# Allegro board RC-TranponderV12.brd
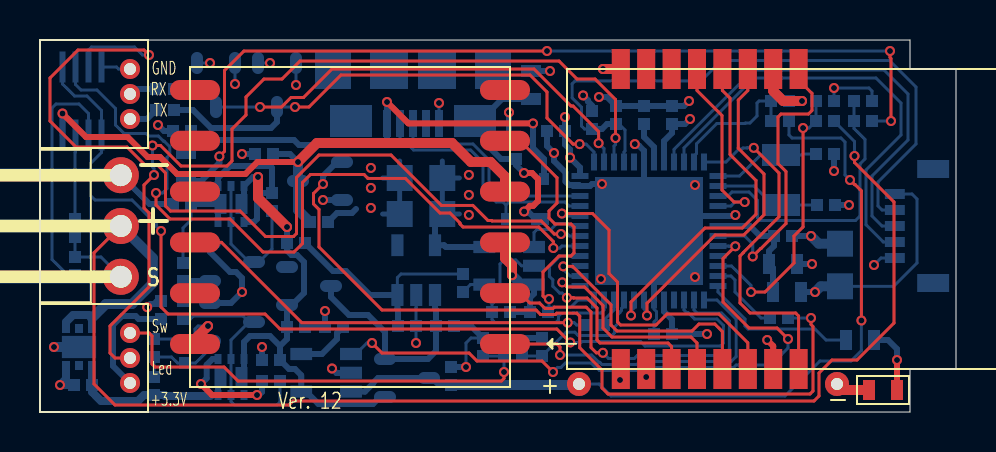
[diagram p0: board, top side]
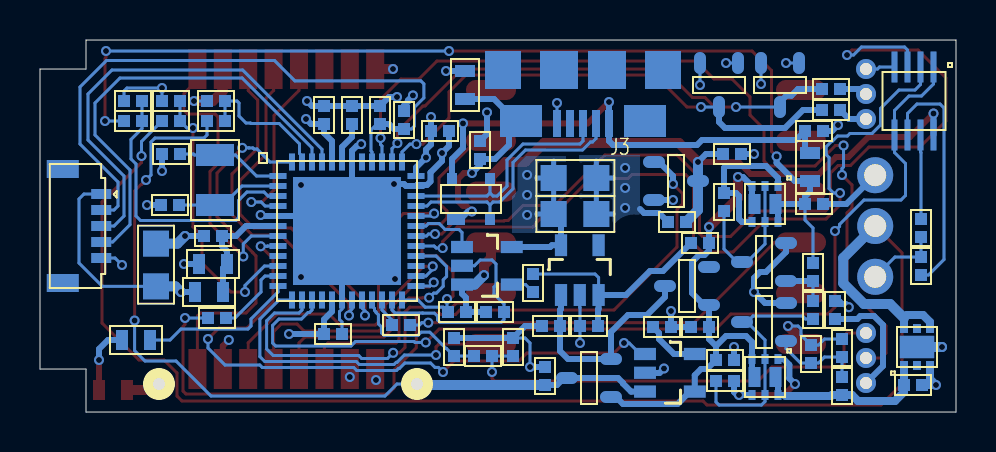
[diagram p1: board, bottom side, seen from below]

Outline 45.8 x 18.6 mm; copper layers: TOP, INNER_LAYER_2, INNER_LAYER_3, BOTTOM. Coordinates in mm from the lower left corner of the outline.
Outline path: 0,18.6 0,0 43.5,0 43.5,2.15 45.8,2.15 45.8,17.15 43.5,17.15 43.5,18.6 0,18.6

## Design rules (mm)
constraint set DEFAULT: min track width 0.15
net group DP1: nets USB_N USB_P

## Placement (name value [footprint] x y rotation side)
C1  1uF/10V  [R_0402]  11.55 2.6 0 bottom
C2  20pF  [R_0402]  39.25 12.9 0 bottom
C3  1uF/10V  [R_0402]  20.55 1.8 270 bottom
C4  100uF/4V  [R_0805]  19.05 11.7 0 bottom
C5  20pF  [R_0402]  39.3 10.35 0 bottom
C6  10uF/6V3  [R_0402]  20.25 4.3 180 bottom
C9  100nF  [R_0402]  31.15 3.9 0 bottom
C10  100nF  [R_0402]  25.8 14.05 0 bottom
C11  100nF  [R_0402]  30.2 14.85 270 bottom
C12  100nF  [R_0402]  37.15 8.8 180 bottom
C13  4.7uF  [R_0603]  37.15 7.4 180 bottom
C14  100nF  [R_0402]  11.2 12.9 0 bottom
C15  1nF  [R_0402]  7.1 10.4 0 bottom
C16  1nF  [R_0402]  7.1 14.05 0 bottom
C17  100nF  [R_0402]  31.6 14.85 270 bottom
C18  100nF  [R_0402]  28.8 14.85 270 bottom
C19  4.7nF / 100V  [R_0603]  24.55 16.35 270 bottom
C20  100nF  [R_0402]  25.1 3.25 270 bottom
C22  100uF/4V  [R_0805]  19.05 9.9 0 bottom
C23  100uF/4V  [R_0805]  40 7.35 270 bottom
C24  10uF/6V3  [R_0402]  13.95 9.5 180 bottom
C25  100nF  [R_0402]  24.95 5 0 bottom
C26  100nF  [R_0402]  7.25 2.9 270 bottom
C27  1uF/10V  [R_0402]  2.15 1.35 0 bottom
D4  RED  [R_0603]  42.15 1.1 180 top
D5  PRTR5V0U2X  [R_SOT143B]  24.25 10.65 180 bottom
D7  BAT54C  [R_SOT23_123]  13.45 6.3 180 bottom
D8  BAT54S  [R_SOT23]  11.85 16.35 90 bottom
D9  BAT54S  [R_SOT23]  8.8 16.35 90 bottom
FB1  470R@100MHz  [R_0603]  37.35 6 180 bottom
FB2  470R@100MHz  [R_0603]  7.3 12.25 270 bottom
J2  3x2.54mm  [L_CONN_1X3WAY-2_54MM_ANGLED]  4.04 6.76 180 top
J3  ZX62-AB-5PA(31)  [R_USB-ZX62-AB-5PA_31_]  18.65 17.1 0 bottom
J4  3x1_1.25mm DF13 connector  [L_CONN_DF13-3P-1_25DS]  4.5 1.45 180 top
J5  3x1_1.25mm DF13 connector  [L_CONN_DF13-3P-1_25DS]  4.5 14.65 180 top
J6  5x1_DF52_0.8mm connector  [R_CONN_DF52-5S-0_8H]  44.35 9.3 270 bottom
Q3  RZR040P01  [R_SOT23]  14 11.55 0 bottom
Q4  RZR040P01  [R_SOT23]  18.35 1.7 180 bottom
Q5  DMP2065UFDB  [R_U-DFN2020-6]  9.55 10.4 270 bottom
Q6  FDV301N  [R_SOT23]  9.6 7.5 180 bottom
Q7  DMP2065UFDB  [R_U-DFN2020-6]  9.55 1.75 270 bottom
Q8  FDV301N  [R_SOT23]  9.6 4.5 180 bottom
R3  20k  [R_0402]  14.7 4.25 0 bottom
R8  100k  [R_0402]  39.25 14.55 0 bottom
R9  499k 0.1%  [R_0402]  37 14.55 0 bottom
R10  100k 0.1%  [R_0402]  37 15.55 180 bottom
R11  10k  [R_0402]  39.25 15.55 180 bottom
R13  1k3  [R_0603]  41 3.6 0 bottom
R15  10k  [R_0402]  36.95 4.7 0 bottom
R16  10k  [R_0402]  27.6 14.6 90 bottom
R17  1M  [R_0402]  23.8 13.1 270 bottom
R18  1k  [R_0402]  1.75 9.2 270 bottom
R19  1k  [R_0402]  1.75 7.3 90 bottom
R22  100k  [R_0402]  12.8 4.25 180 bottom
R23  1M  [R_0402]  12.8 8.45 180 bottom
R24  510k  [R_0402]  21.15 6.45 90 bottom
R27  10k  [R_0402]  23.65 2.8 0 bottom
R28  68R  [R_0402]  6.05 5.1 90 bottom
R29  10k  [R_0402]  22.15 3.25 270 bottom
R30  100k  [R_0402]  41.15 14.55 0 bottom
R31  10k  [R_0402]  41.15 15.55 180 bottom
R32  1k  [R_0402]  23.05 5 180 bottom
R33  1k  [R_0402]  6.25 15.1 180 bottom
R34  1k  [R_0402]  6.25 16.15 180 bottom
R35  10k  [R_0402]  27.75 4.35 180 bottom
R36  100k  [R_0402]  7.15 7 90 bottom
R37  10k  [R_0402]  11.6 10.5 90 bottom
R38  330R  [R_0402]  7.15 5.1 90 bottom
R39  10k  [R_0402]  11.55 1.55 180 bottom
R40  100k  [R_0402]  5.7 1.3 270 bottom
R41  100k  [R_0402]  5.7 3.2 270 bottom
R42  1M  [R_0402]  18.35 4.3 180 bottom
U1  MCP73832T  [R_SOT23-5PIN]  15.55 2.9 270 bottom
U2  NCP718BMT500TBG  [R_WDFN-6]  1.95 3.25 90 bottom
U3  LDLN025M33R  [R_SOT23-5PIN]  19.75 5.85 180 bottom
U4  ATSAMD21G18A-48  [R_QFN48_7X7MM]  30.45 9.05 180 bottom
U7  SN74LVC2G86DCTR  [R_PDSO-G8]  2.1 15.55 270 bottom
U8  E28-2G4M20S  [R_RFE28-2G4M20S]  39.6 9.65 90 top
U10  Quectel-L80  [R_L80_GPS]  15.5 9.75 0 top
U11  SN74LVC1G79  [R_SOT23-5PIN]  24.7 8.25 270 bottom
UNK+  Vbat+  [TESTPIN-0_6MM]  26.95 1.4 180 bottom
UNK-  Vbat-  [TESTPIN-0_6MM]  39.85 1.4 180 bottom
Y1  32.768kHz  [R_XTAL-ABS07]  37.05 11.6 90 bottom

## Library data of the parts
C1 C3 C6 C9-C12 C14 C17 C18 C20 C24-C27 = Cap 0402_0
C2 C5 C15 C16 = Cap 0402: room: ATMEL
C4 C22 C23 = Cap 0402_2
C13 C19 = Cap 0402_1
D4 = LM4040A41IDBZ_1
D5 = TVS_SRV_1: room: USB
D7 = BAT54C: room: serial3
D8 D9 = DOUBLE_SCHOTTKY_0
FB1 FB2 = FERRITE_chip_0: room: ATMEL
J2 = CON3_27: room: COMPORT
J3 = USB_CON_3: room: USB
J4 = CON3_25: room: COMPORT
J5 = CON3_26: room: COMPORT
J6 = CON3_28: room: COMPORT
Q3 Q4 = P_MOSFET_SOT223_1: room: PWR
Q5 = P_MOSFET_SOT223_6: room: PWR
Q6 Q8 = FDV301N_0
Q7 = P_MOSFET_SOT223_5: room: PWR
R3 R8-R11 R13 R15-R19 R22-R24 R27-R42 = Res 0402_0
U1 = MIC4680_17: room: P25
U2 = MIC4680_18: room: P25
U3 = MIC4680_4: room: P25
U4 = AT91SAM4E-BGA144_6
U7 = MIC4680_15: room: P25
U8 = RJ11_30
U10 = RJ11_31
U11 = MIC4680_12: room: P25
UNK+ UNK- = TP_0
Y1 = CRYSTAL/SM: room: ATMEL

## Footprints (pads in the part's own frame, mm; a bottom-side part is the same pattern mirrored in y, then rotated)
L_CONN_1X3WAY-2_54MM_ANGLED
  round 1.8 hole 1.1: 1(0,0) 2(0,-2.54) 3(0,-5.08)
L_CONN_DF13-3P-1_25DS
  round 1 hole 0.6: 1(0,0) 2(0,-1.25) 3(0,-2.5)
R_0402
  rect 0.6x0.6 smd: 1(-0.45,0) 2(0.45,0)
R_0603
  rect 0.6x1 smd: 1(-0.7,0) 2(0.7,0)
R_0805
  rect 1.3x1.3 smd: 1(-1.067,0) 2(1.067,0)
R_CONN_DF52-5S-0_8H
  rect 0.9x1.6 smd: (-2.85,-0.31) (2.85,-0.31)
  rect 0.5x1 smd: 1(-1.6,1.61) 2(-0.8,1.61) 3(0,1.61) 4(0.8,1.61) 5(1.6,1.61)
R_L80_GPS
  oval 2.5x1 smd: 1(7.75,-6.35) 2(7.75,-3.81) 3(7.75,-1.27) 4(7.75,1.27) 5(7.75,3.81) 6(7.75,6.35) 7(-7.75,6.35) 8(-7.75,3.81) 9(-7.75,1.27) 10(-7.75,-1.27) 11(-7.75,-3.81) 12(-7.75,-6.35)
R_PDSO-G8
  rect 1.55x0.3 smd: 1(-1.7,0.975) 2(-1.7,0.325) 3(-1.7,-0.325) 4(-1.7,-0.975) 5(1.7,-0.975) 6(1.7,-0.325) 7(1.7,0.325) 8(1.7,0.975)
R_QFN48_7X7MM
  rect 0.85x0.3 smd: 1(-3.45,2.75) 2(-3.45,2.25) 3(-3.45,1.75) 4(-3.45,1.25) 5(-3.45,0.75) 6(-3.45,0.25) 7(-3.45,-0.25) 8(-3.45,-0.75) 9(-3.45,-1.25) 10(-3.45,-1.75) 11(-3.45,-2.25) 12(-3.45,-2.75) 25(3.45,-2.75) 26(3.45,-2.25) 27(3.45,-1.75) 28(3.45,-1.25) 29(3.45,-0.75) 30(3.45,-0.25) 31(3.45,0.25) 32(3.45,0.75) 33(3.45,1.25) 34(3.45,1.75) 35(3.45,2.25) 36(3.45,2.75)
  rect 0.3x0.85 smd: 13(-2.75,-3.45) 14(-2.25,-3.45) 15(-1.75,-3.45) 16(-1.25,-3.45) 17(-0.75,-3.45) 18(-0.25,-3.45) 19(0.25,-3.45) 20(0.75,-3.45) 21(1.25,-3.45) 22(1.75,-3.45) 23(2.25,-3.45) 24(2.75,-3.45) 37(2.75,3.45) 38(2.25,3.45) 39(1.75,3.45) 40(1.25,3.45) 41(0.75,3.45) 42(0.25,3.45) 43(-0.25,3.45) 44(-0.75,3.45) 45(-1.25,3.45) 46(-1.75,3.45) 47(-2.25,3.45) 48(-2.75,3.45)
  rect 5.4x5.4 smd: 49(0,0)
R_RFE28-2G4M20S
  rect 2x0.9 smd: 1(-7.5,10.56) 2(-7.5,9.29) 3(-7.5,8.02) 4(-7.5,6.75) 5(-7.5,5.48) 6(-7.5,4.21) 7(-7.5,2.94) 8(-7.5,1.67) 9(7.5,1.67) 10(7.5,2.94) 11(7.5,4.21) 12(7.5,5.48) 13(7.5,6.75) 14(7.5,8.02) 15(7.5,9.29) 16(7.5,10.56)
R_SOT23
  oval 1.1x0.6 smd: 1(1.1,-0.95) 2(1.1,0.95) 3(-1.1,0)
R_SOT23-5PIN
  rect 0.61x1.092 smd: 1(0,0) 2(0.94,0) 3(1.88,0) 4(1.88,2.489) 5(0,2.489)
R_SOT23_123
  oval 1.1x0.6 smd: 1(1.1,-0.95) 2(1.1,0.95) 3(-1.1,0)
R_SOT143B
  rect 0.9x0.6 smd: 1(-0.75,-1)
  rect 0.5x0.6 smd: 2(0.95,-1) 3(0.95,1) 4(-0.95,1)
R_U-DFN2020-6
  rect 0.5x0.35 smd: D1(0.9,0.65) D2(-0.9,-0.65) G1(-0.9,0) G2(0.9,0) S1(-0.9,0.65) S2(0.9,-0.65)
  rect 1x0.6 smd: D1_C(0,0.525) D2_C(0,-0.525)
R_USB-ZX62-AB-5PA_31_
  rect 0.4x1.35 smd: 1(-1.3,2.675) 2(-0.65,2.675) 3(0,2.675) 4(0.65,2.675) 5(1.3,2.675)
  rect 2.1x1.6 smd: 6(3.1,2.55) 7(-3.1,2.55)
  rect 1.9x1.9 smd: 8(1.2,0) 9(-1.2,0)
  rect 1.8x1.9 smd: 10(-4,0) 11(4,0)
R_WDFN-6
  rect 0.45x0.4 smd: 1(-0.925,0.65) 2(-0.925,0) 3(-0.925,-0.65) 4(0.925,-0.65) 5(0.925,0) 6(0.925,0.65)
  rect 1.12x1.72 smd: 7(0,0)
R_XTAL-ABS07
  rect 1.1x1.9 smd: 1(-1.25,0) 2(1.25,0)
TESTPIN-0_6MM
  round 1.2 hole 0.6: 1(0,0)

## Nets
+3.3V: C4.2 C9.2 C10.2 C17.2 C22.2 C23.2 D8.2 D9.2 FB1.1 J6.1 Q3.2(S) R16.2 R28.2 U3.5(VOUT) U4.17 U4.36(VDDIO2) U4.44 U8.1(VCC) U11.5(VCC)
GND: C1.1 C2.2 C3.1 C4.1 C5.2 C6.1 C9.1 C10.1 C11.1 C12.1 C13.1 C14.1 C15.1 C16.1 C17.1 C18.1 C19.1 C20.1 C22.1 C23.1 C24.1 C25.1 C26.1 C27.1 D4.2(CATHODE) D8.1 D9.1 J2.3 J3.5 J5.3 J6.5 Q6.2 Q8.2 R3.1 R10.1 R11.1 R17.1 R22.1 R29.1 R31.1 R32.1 R41.1 R42.1 U1.2 U2.3 U2.7 U3.2 U4.5 U4.18 U4.35 U4.42 U4.49 U7.4 U8.2 U8.7 U8.10 U8.16 U10.3 U10.12 U11.3 UNK-.1
VBAT: C3.2 Q4.3 R9.2 U1.3 UNK+.1
VBAT_47P: R9.1 R10.2 U4.47
VIN: J2.2 R8.2 U2.4 U2.6
VIN_5V: C1.2 D7.1 Q4.1 Q5.D2 Q5.D2_C Q7.D2 Q7.D2_C R22.2 R23.2 U1.4(VDD)
VIN_10P: R8.1 R11.2 U4.10
VIN_USB_10P: R30.1 R31.2 U4.3
AUX_RX: J5.2 R34.2
AUX_RX_CPU: D9.3(SIGNAL) R34.1 U4.38
AUX_TX: J5.1 R33.2
AUX_TX_CPU: D8.3(SIGNAL) R33.1 U4.37
BUSY: U4.20 U8.12
CHARGE_STATE: U1.1 U4.8
DIO1: U4.4 U8.13
FRSKY_INVERT: U4.15 U7.1 U7.5
FRSKY_SMART_PORT: J2.1 R18.2 R19.2
FRSKY_SMART_PORT_RX: U4.30 U7.3
FRSKY_SMART_PORT_TX: U4.29 U7.2
GPS_RESET: R35.1 U4.22
GPS_RX: U4.13 U10.1
GPS_TX: U4.14 U10.2
GPS_VBACKUP: C25.2 U4.24 U10.5
LED2: R13.1 U4.12
MISO: U4.28 U8.3
MOSI: U4.25 U8.4
NRESET: U4.19 U8.11
NSS: U4.32 U8.6
POWER_GPS: R15.1 U4.11
POWER_LEVEL: U4.31 U11.1
POWER_ON: R24.1 U11.4
POWER_ON_CLK: R32.2 U4.23 U11.2
RESET: C18.2 J6.2 R16.1 U4.40
RX_EN: U4.48 U8.8
SAFTY_3V3: J4.1 R28.1
SAFTY_LED_N: J4.2 U4.39
SAFTY_SW: J4.3 R27.1 R29.2
SAFTY_SW_FILTERED: C20.2 R27.2 U4.21
SCK: U4.26 U8.5
SWCLK: J6.3 U4.45
SWDIO: J6.4 U4.46
TX_EN: U4.7 U8.9
USB_N: D5.2 J3.2 U4.33
USB_P: D5.3 J3.3 U4.34
VGPS: C14.2 C24.2 Q3.3 U7.8(VCC) U10.4(VCC)
VUSB: C15.2 FB2.2 Q5.D1 Q5.D1_C R30.2 R36.2
XIN32: C2.1 U4.1 Y1.2
XOUT32: C5.1 U4.2 Y1.1
N17065478: C11.2 U4.43
N17065885: C12.2 C13.2 FB1.2 U4.6
N17069937: C16.2 D5.4(VCC) FB2.1 J3.1(VBUS)
N17070561: C19.2 D5.1 J3.6 R17.2
N17081259: Q3.1 R15.2
N17092983: D4.1 R13.2
N17097944: R18.1 U7.7
N17097957: R19.1 U7.6
N17169998: C27.2 Q7.D1 Q7.D1_C R40.2 U2.1(VOUT)
N17170015: C6.2 D7.3 Q4.2(S) U3.1
N17170126: R23.1 R24.2 R42.2 U3.3
N17170142: R3.2 U1.5
N17171313: Q5.S1 Q5.S2 R37.2
N17171323: Q5.G1 Q5.G2 Q6.3 R37.1
N17171750: Q7.S1 Q7.S2 R39.2
N17171768: Q7.G1 Q7.G2 Q8.3 R38.1 R39.1
N17172031: Q6.1 R36.1 R38.2
N17172382: C26.2 Q8.1 R40.1 R41.2
N17174831: R35.2 U10.10

Pads without a net: D7 2; J3 4 7 8 9 10 11; U2 2 5; U3 4; U4 9 16 27 41; U8 14 15; U10 6 7 8 9 11

## Via types
v1: diameter 0.5, hole 0.3, TOP to BOTTOM, 106 vias

## Routing (per net, layer and track width the routed paths; a pad name or vN(x,y) marks a point on that pad's centre or on a via; arc(x,y) is an arc through that point)
+3.3V: length 34.2
  TOP w0.3: 29.04,2.2 U8.1
  BOTTOM w0.15: C23.2 42.68,6.28 43.85,7.45 43.85,10.65 43.6,10.9 J6.1 ; D8.2 v1(12.8,16.35) ; D9.2 v1(9.75,16.4)
  BOTTOM w0.25: C4.2 20.97,11.7 ; C4.2 20.12,10.85 ; C4.2 20.12,12.55 ; 20.12,10.75 C22.2 20.97,9.9
  BOTTOM w0.3: v1(27.15,15.83) 27.4,15.58 27.4,15.52 27.6,15.32 R16.2 ; FB1.1 v1(38.75,6) ; U11.5 20.29,8.25 20.2,8.34 U3.5 19.75,9.53 C22.2 ; R28.2 5.85,5.55 5.7,5.4 5.52,5.4 v1(5.36,5.24) ; v1(33.35,3.9) C9.2 31.6,4.62 31.2,5.02 U4.17 ; U4.36 27,12.22 v1(26.5,12.72) 26.5,13.12 26.25,13.37 C10.2 v1(26.25,14.75) ; Q3.2 v1(14.15,10.6) ; v1(32.5,14.65) 32.25,14.4 C17.2 31.6,13.95 31.2,13.55 U4.44
  BOTTOM w0.5: v1(38.75,6) 39.03,6.28 C23.2
  vias: v1(21.44,11.85) v1(21.44,10.85) v1(21.44,9.85) v1(29,1.6)
GND: length 99
  TOP w0.3: U8.7 36.66,3.3 v1(36.36,3.6) ; 30.31,2.2 U8.2 ; 36.66,17.2 U8.10 ; 28.2,17.2 v1(28.15,17.15)
  TOP w0.5: v1(28.15,17.15) U8.16 ; 7,3.4 U10.12 7.75,3.65 v1(8.4,4.3) ; D4.2 40.15,1.1 UNK-.1 ; U8.10 36.66,16.05 37.16,15.55 v1(38.1,15.55) ; U10.3 23.25,7.69 23.6,7.34 v1(23.6,6.84) ; U8.2 v1(30.31,1.75)
  INNER_LAYER_2 w0.25: J2.3 4.04,12.94 ; J2.3 4.04,10.74 ; J2.3 5.14,11.84 ; J2.3 2.94,11.84 ; 39.05,1.4 UNK-.1 ; UNK-.1 39.85,2.2 ; UNK-.1 40.65,1.4 ; UNK-.1 39.85,0.6 ; 3.8,17.15 J5.3 ; J5.3 4.5,17.85 ; J5.3 5.2,17.15
  BOTTOM w0.15: v1(41.7,7.35) 42.05,7.7 J6.5 ; U4.18 30.7,5.15 30.82,5.02 30.82,4.87 30.83,4.87 30.83,4.63 30.7,4.5 C9.1 ; R41.1 6.58,3.65 6.88,3.35 C26.1 7.75,3.85 7.75,4.15 7.9,4.3 v1(8.4,4.3) ; v1(21.3,2.25) 21.3,3.45 21.55,3.7 R29.1 ; U3.2 18.81,5.23 18.8,5.22 R42.1 v1(18.8,3.45) ; D9.1 v1(8.5,17.45) ; U7.4 3.83,17.25 3.92,17.15 J5.3 ; R11.1 v1(39.7,16.2) 41.45,16.2 41.6,16.05 R31.1 ; D8.1 v1(11.5,17.45) ; v1(38.1,15.55) R10.1 ; J3.5 v1(19.95,15.45)
  BOTTOM w0.25: C4.1 17.98,12.55 ; C4.1 17.13,11.7 ; C4.1 17.98,10.85 ; 17.98,10.75 C22.1 17.13,9.9
  BOTTOM w0.3: v1(29.74,13.39) 29.84,13.3 29.96,13.3 30.2,13.06 U4.42 30.2,10.75 ; R32.1 C25.1 24.5,5.72 24.7,5.92 U11.3 ; C16.1 6.2,14.05 v1(5.9,14.35) ; v1(32.45,15.55) 32.2,15.3 C17.1 C11.1 C18.1 28.35,15.75 v1(27.95,15.75) ; U1.2 15.26,1.96 15.25,1.95 14.82,1.95 v1(14.6,2.17) ; C3.1 v1(21.3,2.25) ; R22.1 R3.1 v1(14.25,5.05) ; C14.1 v1(10.1,12.9) ; Q8.2 9.55,5.45 v1(10.1,6) 10.1,6.7 9.8,7 9.5,7 8.5,8 Q6.2 ; C10.1 25.35,13.3 v1(25.7,12.95) 25.7,12.55 26.27,11.98 26.27,11.53 26.45,11.35 26.95,11.35 U4.35 27.5,11.3 27.6,11.4 v1(28.1,11.4) ; C19.1 v1(25.5,17.05) ; R17.1 23.45,13.9 v1(23.45,14.98) ; C24.1 14.85,9.95 15.6,9.95 15.8,10.15 ; C15.1 5.48,10.4 J2.3 ; C2.2 v1(39.7,12.05) ; C1.1 v1(11.1,3.25) ; C6.1 21.55,4.3 R29.1 C20.1 ; U4.18 30.7,8.8 U4.49 31.2,9.8 U4.5 34.72,9.8 v1(34.77,9.85) ; C5.2 v1(40.45,10.35) ; C12.1 v1(38.55,8.8) ; C13.1 v1(38.6,7.4)
  BOTTOM w0.4: C27.1 v1(1,1.35) 1.3,1.65 1.3,2.32
  BOTTOM w0.5: U11.3 24.07,6.37 v1(23.6,6.84) ; v1(38.55,8.8) 38.93,8.42 C23.1 ; v1(0.7,3.25) U2.7
  vias: v1(16.54,12.2) v1(16.54,11.2) v1(16.54,10.2) v1(28.05,6.65) v1(32.75,11.35) v1(32.75,6.75)
VBAT: length 41.6
  TOP w0.15: v1(40.5,11.6) 40.73,11.37 40.75,11.37 41.07,11.05 v1(41.07,4.58)
  BOTTOM w0.15: UNK+.1 27.95,1.4 28.55,0.8 37.25,0.8 39,2.55 40.55,2.55 41.07,3.07 v1(41.07,4.58) ; v1(40.5,11.6) 40.25,11.85 40.25,13.5 40.05,13.7 37.6,13.7 37.45,13.85 R9.2
  BOTTOM w0.3: U1.3 16.25,1.02 16.65,1.42 16.65,1.45 16.9,1.7 Q4.3 19.6,1.7 19.95,1.35 C3.2
  BOTTOM w0.5: UNK+.1 26.9,1.35 C3.2
VBAT_47P: length 7
  BOTTOM w0.15: R9.1 R10.2 35.95,15.55 35.85,15.45 35.85,14.8 35.5,14.45 35.28,14.45 35.25,14.43 33.84,14.43 32.83,13.41 32.83,12.93 32.7,12.8 U4.47
VIN: length 72.2
  TOP w0.15: J2.2 2.7,7.96 2.7,1.4 3.75,0.35 12.45,0.35 12.65,0.55 38.7,0.55 38.95,0.8 38.95,1.95 39.6,2.6 40.85,2.6 42.7,4.45 42.7,10.5 40.73,12.48 v1(40.73,12.8)
  BOTTOM w0.15: v1(40.73,12.8) 40.73,13.53 R8.2
  BOTTOM w0.4: U2.6 2.6,4.7 2.45,4.85 1.65,4.85 1.3,4.5 U2.4
  BOTTOM w0.5: J2.2 5.64,7.7 5.64,6.44 4.6,5.4 3.3,5.4 2.6,4.7
VIN_5V: length 23.5
  TOP w0.5: v1(12.35,9.25) 10.9,10.7 v1(10.9,11.75)
  BOTTOM w0.3: v1(10.9,11.75) 10.65,11.75 Q5.D2 10.2,10.53 10.08,10.4 ; 12,3.3 11.5,3.8 10.5,3.8 10.2,3.5 Q7.D2 10.2,1.88 10.08,1.75 ; 12,3.3 12.35,3.65 R22.2 D7.1 12.6,5.35 13.2,5.95 13.2,7.5 12.85,7.85 12.57,7.85 12.35,8.08 R23.2 v1(12.35,9.25) ; 12,3.3 C1.2 12.45,2.15 12.75,2.15 13.06,1.84 U1.4 13.3,1.02 13.92,0.4 16.65,0.4 17,0.75 Q4.1
VIN_10P: length 13.9
  TOP w0.15: v1(38.15,14.2) 38.15,9.25 37.7,8.8 37.7,7.45 36.25,6 v1(35.55,6)
  BOTTOM w0.15: U4.10 34.58,7.3 35.55,6.33 v1(35.55,6) ; R11.2 R8.1 38.45,14.2 v1(38.15,14.2)
VIN_USB_10P: length 14.5
  BOTTOM w0.15: R31.2 R30.1 40.7,14.18 41.25,13.62 41.25,12.65 41,12.4 41,9.8 40.77,9.58 36.01,9.58 35.88,9.71 35.88,10.58 35.45,11 34.6,11 34.4,10.8 U4.3
AUX_RX: length 1.4
  BOTTOM w0.3: R34.2 4.75,16.15 J5.2
AUX_RX_CPU: length 25.5
  TOP w0.15: v1(11,15.25) 12.08,15.25 12.55,15.73 13.18,15.73 14.6,17.15 24.7,17.15 26.55,15.3 26.65,15.3 27.93,14.02 v1(27.93,13.44)
  BOTTOM w0.15: U4.38 28.2,13.17 v1(27.93,13.44) ; D9.3 v1(11,15.25)
  BOTTOM w0.3: D9.3 8.8,15.5 8.48,15.82 8.23,15.82 7.9,16.15 R34.1
AUX_TX: length 1.5
  BOTTOM w0.3: J5.1 5.35,14.65 R33.2
AUX_TX_CPU: length 25.8
  TOP w0.15: v1(12.75,15.25) 13.45,15.25 15.05,16.85 24.5,16.85 25.35,16 25.35,14.7 26.66,13.39 v1(26.98,13.39)
  BOTTOM w0.15: U4.37 27.7,13 27.3,13.39 v1(26.98,13.39) ; v1(12.75,15.25) D8.3
  BOTTOM w0.3: D8.3 11.85,14.5 11.55,14.2 8.55,14.2 7.65,15.1 R33.1
BUSY: length 17.6
  TOP w0.15: 34.12,17.2 U8.12 34.12,16.07 34.5,15.7 34.5,12.88 35.8,11.58 35.8,9.89 35.11,9.2 33.25,9.2 29.55,5.5 v1(29.55,4.83)
  BOTTOM w0.15: U4.20 29.7,5.2 29.55,5.05 v1(29.55,4.83)
CHARGE_STATE: length 31.9
  TOP w0.15: v1(37.4,3.65) 36.85,4.2 35.45,4.2 34.15,5.5 34.15,7.67 v1(34.76,8.29) ; v1(16.6,3.45) 17.1,2.95 21.45,2.95 21.85,2.55 25.1,2.55 v1(25.65,2)
  BOTTOM w0.15: v1(37.4,3.65) 37.4,3.2 36.55,2.35 34.81,2.35 34.69,2.23 30.11,2.23 29.96,2.07 27.98,2.07 27.87,2.18 27.82,2.18 27.56,2.45 26.27,2.45 26.05,2.23 25.88,2.23 v1(25.65,2) ; v1(16.6,3.45) 16.34,3.45 15.79,2.9 U1.1 ; v1(34.76,8.29) 34.44,8.29 34.42,8.3 U4.8
DIO1: length 9.4
  TOP w0.15: v1(35.24,10.5) 34.7,10.5 34.1,11.1 34.1,14.83 32.85,16.07 U8.13
  BOTTOM w0.15: v1(35.24,10.5) 34.74,10.5 34.55,10.3 U4.4
FRSKY_INVERT: length 48.6
  TOP w0.15: v1(26.51,3.48) 25.84,4.15 12,4.15 11.25,4.9 6.4,4.9 6.05,5.25 v1(6.05,9.05)
  BOTTOM w0.15: v1(6.05,9.05) 5.82,9.28 5.82,9.38 4.6,10.6 2.75,10.6 2.52,10.83 2.52,12.43 3.08,12.98 U7.5 3.08,15.08 2.35,15.8 1.73,15.8 1.12,16.4 U7.1 ; U4.15 32.2,5.1 32.32,4.98 32.4,4.98 32.73,4.65 33.85,4.65 34.17,4.33 34.17,3.45 34.02,3.3 30.25,3.3 30.02,3.52 27.1,3.52 27.05,3.48 v1(26.51,3.48)
FRSKY_SMART_PORT: length 3.7
  BOTTOM w0.15: R18.2 R19.2 3.05,7.75 J2.1
FRSKY_SMART_PORT_RX: length 46.7
  TOP w0.15: v1(5.45,17.85) 5.2,18.1 1.9,18.1 0.5,16.7 0.5,14.55 1.8,13.25 4.35,13.25 5.27,12.33 5.9,12.33 6.27,11.95 6.27,10.3 6.52,10.05 10,10.05 11.27,8.78 12.68,8.78 12.82,8.93 12.82,11.73 13.95,12.85 17.55,12.85 20.07,10.33 21.64,10.33 22.39,9.58 22.57,9.58 22.6,9.55 25.06,9.55 25.71,8.9 v1(26.05,8.9)
  BOTTOM w0.15: 2.42,17.25 2.42,18.1 2.58,18.25 4.73,18.25 5.12,17.85 v1(5.45,17.85) ; U4.30 26.48,8.8 26.38,8.9 v1(26.05,8.9)
FRSKY_SMART_PORT_TX: length 38.1
  TOP w0.15: v1(25.67,8.2) 25.67,8.52 24.94,9.25 21.15,9.25 21,9.4 21,9.45 20.5,9.95 20,9.95 18.27,11.68 16.4,11.68 16.2,11.88 13.52,11.88 13.12,11.48 13.12,8.42 12.7,8 11.15,8 9.5,9.65 6.5,9.65 5.8,10.35 v1(5.8,10.95)
  BOTTOM w0.15: U7.2 1.77,16.38 2.05,16.1 2.85,16.1 3.77,15.17 3.77,14.35 4.2,13.93 5.3,13.93 5.43,13.8 5.92,13.8 6.18,13.54 6.21,13.54 6.49,13.26 6.49,12.87 6.35,12.73 6.35,11.17 6.12,10.95 v1(5.8,10.95) ; U4.29 26.09,8.3 25.99,8.2 v1(25.67,8.2)
GPS_RESET: length 1.5
  BOTTOM w0.15: R35.1 28.2,4.6 28.7,5.1 U4.22
GPS_RX: length 16.3
  TOP w0.15: U10.1 25.85,3.4 26,3.25 v1(26,2.85)
  BOTTOM w0.15: U4.13 33.85,5.6 34.81,4.64 34.81,2.77 34.56,2.52 29.99,2.52 29.84,2.38 28.1,2.38 27.99,2.48 27.95,2.48 27.58,2.85 v1(26,2.85)
GPS_TX: length 17.8
  TOP w0.15: U10.2 24,5.94 24.49,5.45 24.98,5.45 25.25,5.17 25.65,5.17 25.71,5.24 27.31,5.24 27.55,5 27.55,3.23 27.82,2.96 v1(28.14,2.96)
  BOTTOM w0.15: U4.14 32.7,5.1 32.85,4.95 34.08,4.95 34.47,4.56 34.47,3.15 34.14,2.82 29.86,2.82 29.71,2.67 28.43,2.67 v1(28.14,2.96)
GPS_VBACKUP: length 14.9
  TOP w0.15: 24,13.56 25.85,11.71 25.85,10.45 25.45,10.05 25.45,9.7 25.75,9.4 26.55,9.4 26.7,9.25 26.7,7.95 26.55,7.8 25.95,7.8 25.15,7 25.15,5.8 25.3,5.65 v1(25.45,5.65)
  TOP w0.3: U10.5 24,13.56
  BOTTOM w0.15: C25.2 25.45,5.05 ; 25.45,5.05 25.64,5.24 26.54,5.24 26.9,5.6 U4.24 ; 25.45,5.05 v1(25.45,5.65)
LED2: length 7.9
  BOTTOM w0.15: U4.12 33.9,6 35.25,4.65 35.25,4.3 35.4,4.15 38.75,4.15 39.3,3.6 R13.1
MISO: length 12.1
  TOP w0.15: U8.3 31.58,3.27 31.4,3.45 28,3.45 27.85,3.6 27.85,5.2 27.35,5.7 26.68,5.7 26.67,5.72 v1(26.34,5.72)
  BOTTOM w0.15: U4.28 26,7.8 25.47,7.27 25.47,6.78 25.64,6.61 25.64,6.29 25.98,5.95 26.11,5.95 v1(26.34,5.72)
MOSI: length 10.9
  TOP w0.15: U8.4 32.85,3.45 32.55,3.75 28.6,3.75 28.15,4.2 28.15,5.33 27.22,6.25 26.34,6.25 v1(26.11,6.48)
  BOTTOM w0.15: U4.25 26.3,6.3 v1(26.11,6.48)
NRESET: length 17.2
  TOP w0.15: 35.39,17.2 U8.11 35.39,16.07 34.91,15.6 34.91,13.19 36.2,11.9 36.2,9.86 35.19,8.85 33.76,8.85 30.35,5.44 v1(30.35,4.83)
  BOTTOM w0.15: U4.19 30.2,5.15 30.35,5 v1(30.35,4.83)
NSS: length 17.1
  TOP w0.15: U8.6 35.39,3.46 33.95,4.9 31.35,4.9 30.8,4.35 29.03,4.35 28.88,4.5 28.88,4.55 28.88,4.55 28.88,6.5 28.45,6.92 28.45,9.1 27.63,9.92 v1(26.09,9.92)
  BOTTOM w0.15: v1(26.09,9.92) 26.22,9.8 U4.32
POWER_GPS: length 3.8
  BOTTOM w0.15: R15.1 36.05,4.7 34.75,6 34.75,6.6 34.55,6.8 U4.11
POWER_LEVEL: length 3.3
  BOTTOM w0.15: U4.31 26.5,9.3 26.38,9.43 25.84,9.43 25.54,9.12 24.85,9.12 24.7,8.98 U11.1
POWER_ON: length 1.2
  BOTTOM w0.15: R24.1 21.52,6.37 U11.4
POWER_ON_CLK: length 11.5
  BOTTOM w0.15: U11.2 24.08,7.31 23.79,7.6 23.2,7.6 23,7.4 23,6.35 23.1,6.25 23.1,5.9 22.6,5.4 R32.2 22.6,4.62 22.75,4.47 25.79,4.47 25.93,4.61 25.93,4.79 26.07,4.94 26.66,4.94 26.67,4.95 28.05,4.95 28.2,5.1 U4.23
RESET: length 32.3
  BOTTOM w0.15: J6.2 42.1,10.1 41.9,10.3 41.9,11.5 43.8,13.4 43.8,16.25 42.48,17.57 34.08,17.57 33.06,16.56 26.76,16.56 26.61,16.41 26.61,15.71 27.07,15.24 27.07,14.3 27.23,14.15 R16.1 ; U4.40 29.2,13 29.25,13.05 29.25,14.1 28.95,14.4 C18.2
  BOTTOM w0.3: C18.2 28.35,14.4 28.1,14.15 R16.1
RX_EN: length 17.7
  TOP w0.15: v1(35.69,13.21) 36.95,11.95 36.95,9.76 35.16,7.97 35.16,7.96 35,7.8 35,5.45 35.5,4.95 37.78,4.95 37.93,4.8 U8.8
  BOTTOM w0.15: v1(35.69,13.21) 35.36,13.21 35.36,13.2 35.16,13.2 35.1,13.15 34.95,13.15 34.3,12.5 U4.48
SAFTY_3V3: length 5.9
  BOTTOM w0.3: J4.1 3.65,2.3 3.65,4.35 4.1,4.8 4.78,4.8 4.93,4.65 R28.1
SAFTY_LED_N: length 43.8
  TOP w0.15: J4.2 3.75,2.7 3.5,2.95 3.5,4.3 5.45,6.25 5.45,9.95 5.2,10.2 5.2,11.35 v1(5.7,11.85) ; v1(5.62,13.33) 6.02,13.33 7.05,12.3 9.35,12.3 9.6,12.55 9.6,14.15 10.3,14.85 10.3,15.75 11.2,16.65 12.1,16.65 13,17.55 25.95,17.55 26.85,16.65 27.75,16.65 28.77,15.62 v1(28.77,13.7)
  BOTTOM w0.15: v1(5.7,11.85) 5.7,12.18 5.62,12.25 v1(5.62,13.33) ; v1(28.77,13.7) 28.77,13.38 28.7,13.3 U4.39
SAFTY_SW: length 22.7
  TOP w0.15: v1(23.2,2) 23.2,1.68 23.07,1.55 9.9,1.55 9.2,2.25 5.75,2.25 5.6,2.4 5.6,3.8 5.45,3.95 J4.3
  BOTTOM w0.15: R29.2 R27.1 v1(23.2,2)
SAFTY_SW_FILTERED: length 7.1
  BOTTOM w0.15: R27.2 C20.2 25.48,3.17 25.49,3.17 26.31,3.99 26.74,3.99 26.91,3.82 28.59,3.82 28.73,3.96 28.73,4.25 28.88,4.4 28.88,4.85 29,4.98 29,5.01 29.07,5.08 29.07,5.17 29.2,5.3 U4.21
SCK: length 13.2
  TOP w0.15: U8.5 34.12,4.02 33.74,4.4 32.95,4.4 32.6,4.05 28.85,4.05 28.55,4.35 28.55,5.36 26.63,7.28 v1(26.16,7.28)
  BOTTOM w0.15: U4.26 26.5,6.8 26.16,7.14 v1(26.16,7.28)
SWCLK: length 22.7
  BOTTOM w0.15: U4.45 31.7,13.13 35.67,17.1 42.2,17.1 43.4,15.9 43.4,13.6 41.6,11.8 41.6,9.8 42.1,9.3 J6.3
SWDIO: length 22.1
  BOTTOM w0.15: J6.4 42.16,8.5 41.3,9.37 41.3,12.1 43.05,13.85 43.05,15.45 41.8,16.7 35.69,16.7 32.2,13.21 U4.46
TX_EN: length 14.6
  TOP w0.15: v1(35.64,7.78) 36.03,8.17 36.05,8.17 37.3,9.42 37.3,12.02 36.9,12.42 36.9,14.75 37.05,14.9 38.42,14.9 38.6,15.08 38.6,15.93 37.93,16.6 U8.9
  BOTTOM w0.15: U4.7 35.24,8.8 35.64,8.4 v1(35.64,7.78)
USB_N: length 12.7
  BOTTOM w0.15: J3.2 18,13.68 18.18,13.5 18.28,13.5 18.68,13.1 21.53,13.1 22.15,12.48 22.15,11.16 22.81,10.5 23.15,10.5 23.3,10.35 ; 23.3,10.35 D5.2 ; 23.3,10.35 23.45,10.5 26.25,10.5 26.45,10.3 U4.33
USB_P: length 12
  BOTTOM w0.15: U4.34 23.45,10.8 23.3,10.95 ; D5.3 23.3,10.95 ; 23.3,10.95 23.15,10.8 22.94,10.8 22.45,11.29 22.45,12.6 21.65,13.4 18.8,13.4 18.65,13.55 J3.3
VGPS: length 31.2
  TOP w0.3: v1(1.12,14.93) 2.3,13.75 4.38,13.75 5.38,12.75 6,12.75 6.85,11.9 10.27,11.9 10.87,12.5 v1(12.9,12.5)
  TOP w0.5: v1(12.9,12.5) 13.85,13.45 20.6,13.45 21.55,12.5 22.52,12.5 23.25,11.77 U10.4
  BOTTOM w0.3: v1(12.9,12.5) 12.5,12.9 C14.2 ; U7.8 v1(1.12,14.93)
  BOTTOM w0.5: v1(12.9,12.5) Q3.3 12.9,10.1 C24.2
VUSB: length 51.7
  TOP w0.15: v1(25.35,18.05) 10.2,18.05 9.23,17.07 9.23,13.04 v1(8.97,12.78) ; v1(42.5,18.05) 42.5,17.73 42.55,17.68 v1(42.55,14.55)
  BOTTOM w0.15: R36.2 7.15,9.2 7.55,9.6 C15.2 ; v1(42.5,18.05) v1(25.35,18.05) ; R30.2 v1(42.55,14.55)
  BOTTOM w0.3: Q5.D1 8.9,10.28 Q5.D1_C C15.2 7.55,10.78 7.3,11.03 FB2.2 8.06,11.55 8.97,12.46 v1(8.97,12.78)
XIN32: length 5.4
  BOTTOM w0.15: C2.1 38.12,12.9 38.08,12.85 Y1.2 36.02,12.85 34.98,11.8 U4.1
XOUT32: length 5.3
  BOTTOM w0.15: C5.1 Y1.1 36.65,10.35 35.7,11.3 U4.2
N17065478: length 2.1
  BOTTOM w0.3: U4.43 30.7,13.25 30.2,13.75 C11.2
N17065885: length 6
  BOTTOM w0.3: FB1.2 36.65,7.2 C13.2 36.45,8.05 36.7,8.3 C12.2 36,8.8 35.5,9.3 U4.6
N17069937: length 24.1
  TOP w0.3: v1(24.65,14.43) 18.42,14.43 v1(17.35,15.5)
  BOTTOM w0.3: v1(24.65,14.43) 24.65,13.2 25.2,12.65 D5.4 ; FB2.1 7.55,13.2 C16.2 8,13.6 12.7,13.6 12.95,13.35 17.15,13.35 17.35,13.55 J3.1 v1(17.35,15.5)
N17070561: length 11.1
  TOP w0.3: v1(24.21,10.03) 24.49,10.31 24.66,10.31 24.9,10.55 24.9,11.65 24.6,11.95 v1(24.2,11.95)
  BOTTOM w0.15: D5.1 24.77,9.65
  BOTTOM w0.3: v1(24.21,10.03) 24.4,10.03 24.77,9.65 ; C19.2 23.1,15.65 22,14.55 J3.6 22.35,13.95 22.35,13.35 23.05,12.65 R17.2 23.8,12.35 v1(24.2,11.95)
N17081259: length 39.3
  TOP w0.15: v1(14.15,11.4) 13.68,10.93 13.68,10.4 13.95,10.13 13.95,8.25 17.1,5.1 24.8,5.1 25.02,4.88 25.77,4.88 25.84,4.94 26.84,4.94 26.99,4.79 26.99,3.21 28.1,2.1 28.1,1.2 28.4,0.9 38.5,0.9 38.65,1.05 38.65,4.28 38.55,4.38 v1(38.55,4.7)
  BOTTOM w0.15: v1(38.55,4.7) R15.2
  BOTTOM w0.3: Q3.1 14.85,12.5 14.15,11.8 v1(14.15,11.4)
N17092983: length 3.4
  TOP w0.3: D4.1 v1(42.85,2.6)
  BOTTOM w0.3: R13.2 42.4,3.6 42.85,3.15 v1(42.85,2.6)
N17097944: length 4.2
  BOTTOM w0.15: U7.7 1.77,13 1.75,12.98 R18.1
N17097957: length 12.2
  BOTTOM w0.15: 2.42,13.85 2.42,14.93 1.95,15.4 0.8,15.4 0.6,15.2 0.6,7.62 1.38,6.85 R19.1
N17169998: length 8.9
  BOTTOM w0.3: Q7.D1_C 8.9,1.62 Q7.D1 8.58,0.85 8.52,0.8
  BOTTOM w0.4: 8.52,0.8 6.25,0.8 6.2,0.85 R40.2 5.2,0.85 4.9,0.55 3.05,0.55 2.6,1 C27.2 2.6,2.32
N17170015: length 10.9
  BOTTOM w0.3: D7.3 14.55,5.75 15.45,4.85 16.4,4.85 17.25,4 Q4.2 19.4,2.65 19.8,3.05 C6.2 19.8,5.1 19.75,5.15 U3.1
N17170126: length 11.5
  BOTTOM w0.15: R24.2 18.05,6.9 17.87,6.72 U3.3
  BOTTOM w0.3: R23.1 14.65,7.05 15.3,7.05 16.5,5.85 U3.3 17.87,5.15 17.9,5.12 R42.2
N17170142: length 2.8
  BOTTOM w0.3: R3.2 14.85,3.95 14.85,3.65 14.1,2.9 U1.5
N17171313: length 7.3
  BOTTOM w0.3: Q5.S1 8.9,11.7 9.5,12.3 11.5,12.3 11.6,12.2 R37.2 11,10.95 10.85,10.8 10.85,9.65 10.7,9.5 Q5.S2
N17171323: length 7.5
  BOTTOM w0.15: R37.1 11.6,8.15 10.95,7.5 Q6.3 10.45,7.5 9.55,8.4 Q5.G2 Q5.G1
N17171750: length 6.4
  TOP w0.3: v1(8.05,1.4) 8.6,0.85 v1(10.85,0.85)
  BOTTOM w0.15: 11.1,1.6 R39.2
  BOTTOM w0.3: Q7.S2 v1(10.85,0.85) 10.95,0.85 11.1,1 R39.2 ; v1(8.05,1.4) 8.33,1.68 8.33,2.36 8.62,2.65 Q7.S1
N17171768: length 11.8
  BOTTOM w0.15: R38.1 7.52,4.65 7.67,4.8 10.15,4.8 10.45,4.5 9.55,3.6 Q7.G1 Q7.G2 9.55,0.53 9.73,0.35 11.85,0.35 12,0.5 R39.1 12,1.6
  BOTTOM w0.3: 10.45,4.5 Q8.3
N17172031: length 2.4
  BOTTOM w0.15: R38.2 R36.1
  BOTTOM w0.3: Q6.1 R36.1
N17172382: length 4.6
  BOTTOM w0.15: R40.1 R41.2 6.58,2.75 6.88,2.45 C26.2 7.77,2.45 8.5,3.17 Q8.1
N17174831: length 21.3
  TOP w0.15: v1(26.39,4.47) 13.09,4.47 9.08,8.48 U10.10
  BOTTOM w0.15: v1(26.39,4.47) 26.71,4.47 26.83,4.35 R35.2

## Copper pours and planes (outline as drawn; the poured copper is in the pictures)
+3.3V on BOTTOM: 19.5,12.8 19.5,8.95 22.2,8.95 22.2,12.8
+3.3V on INNER_LAYER_3: 44.05,19.35 44.05,-0.9 0.05,-0.9 0.05,19.35 ; 2 cut-outs
GND on BOTTOM: 18.85,12.85 18.85,9.05 15.8,9.05 15.8,12.85
GND on INNER_LAYER_2: 44.3,19.7 44.3,-1.15 -0.5,-1.15 -0.5,19.7

## Text on the board
Ref Des/Silkscreen Top: S.port | Vin | GND | RX | +3.3V | Sw | Led | TX | Ver. 12 | s
User.11: FIGURE | FINISHED_SIZE | 0.3 | 0.6 | 1.1 | DRILL CHART: TOP to BOTTOM | ALL UNITS ARE IN MILLIMETERS | TOLERANCE_DRILL | +0.05/-0.05 | +0.003/-0.003 | +0.08/-0.08 | PLATED | QTY | 106 | 6 | 2 | 3
